# Altium PCB PCBBB.PcbDoc
Units mil, origin at the board's own origin, x right, y up, seen from the top; angles counter-clockwise.
Board outline 2620.03 x 3795.03 mil, 2 copper layers (Top Layer, Bottom Layer); 31 components, 32 nets, 149 pads, 5 vias.
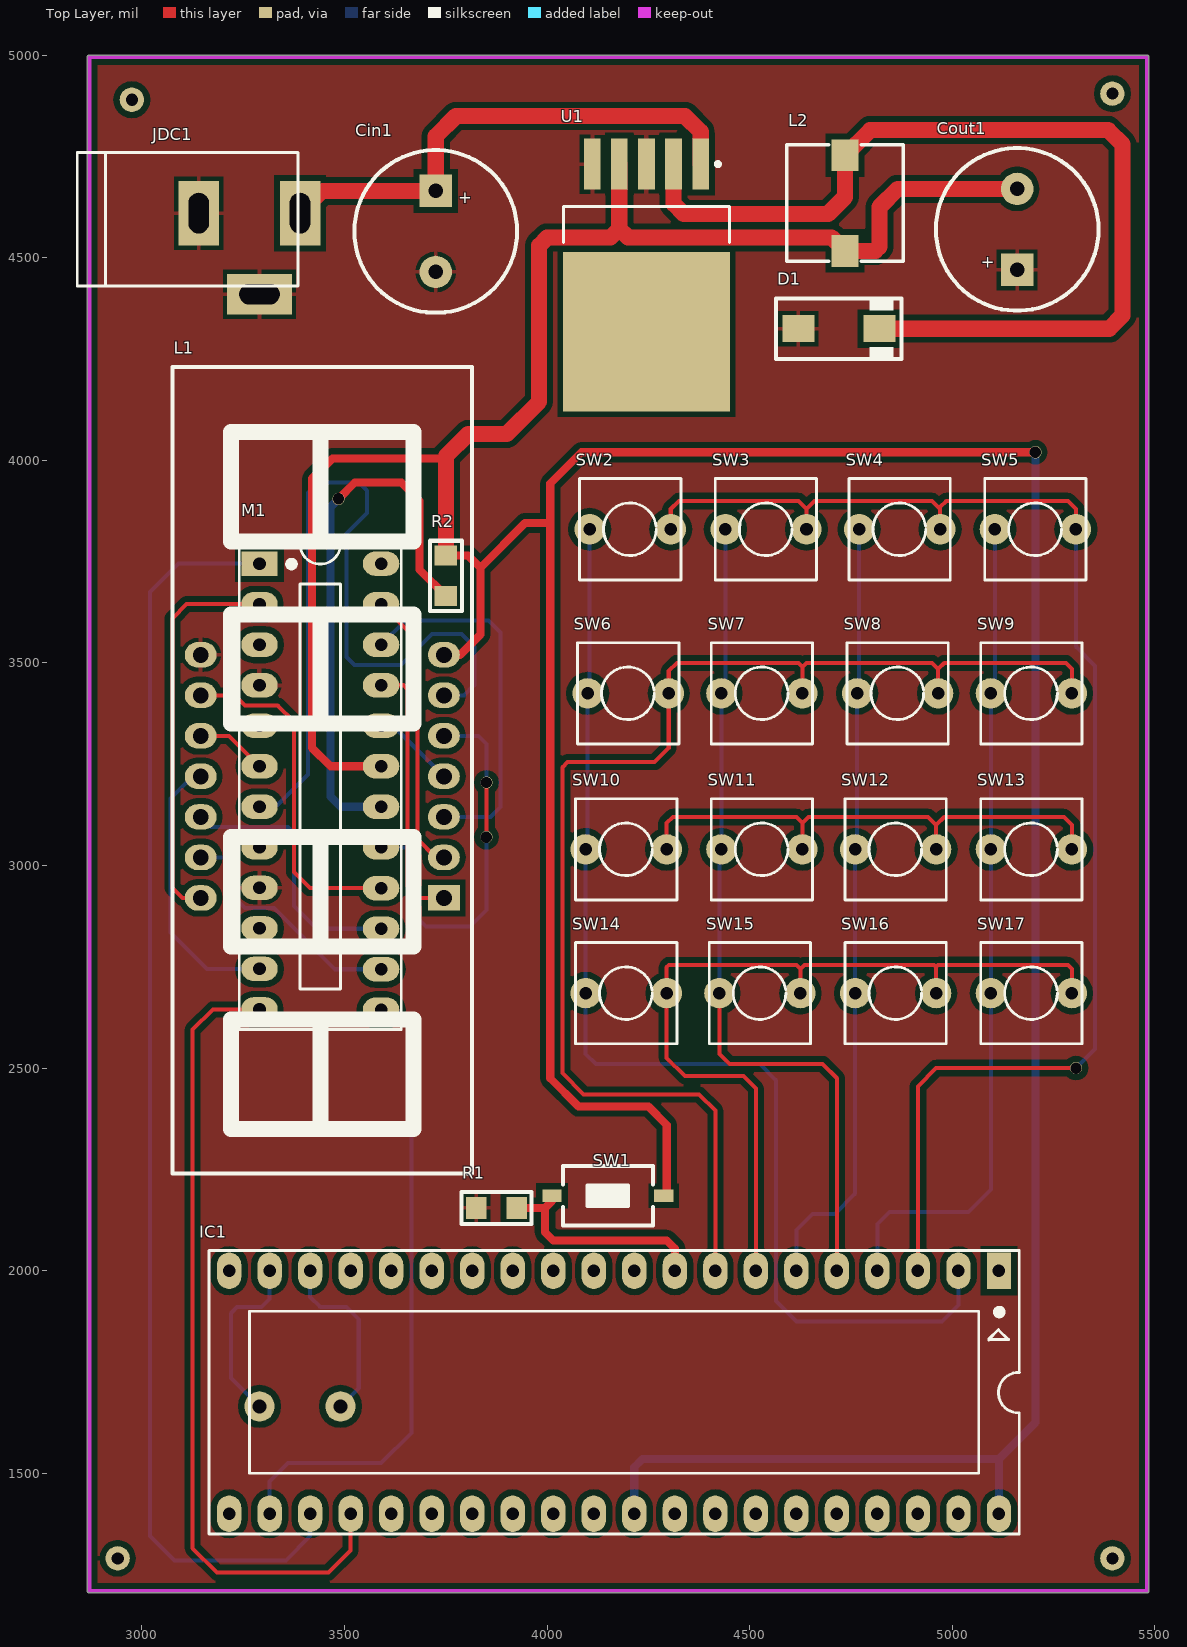
[diagram p0: Top Layer view]
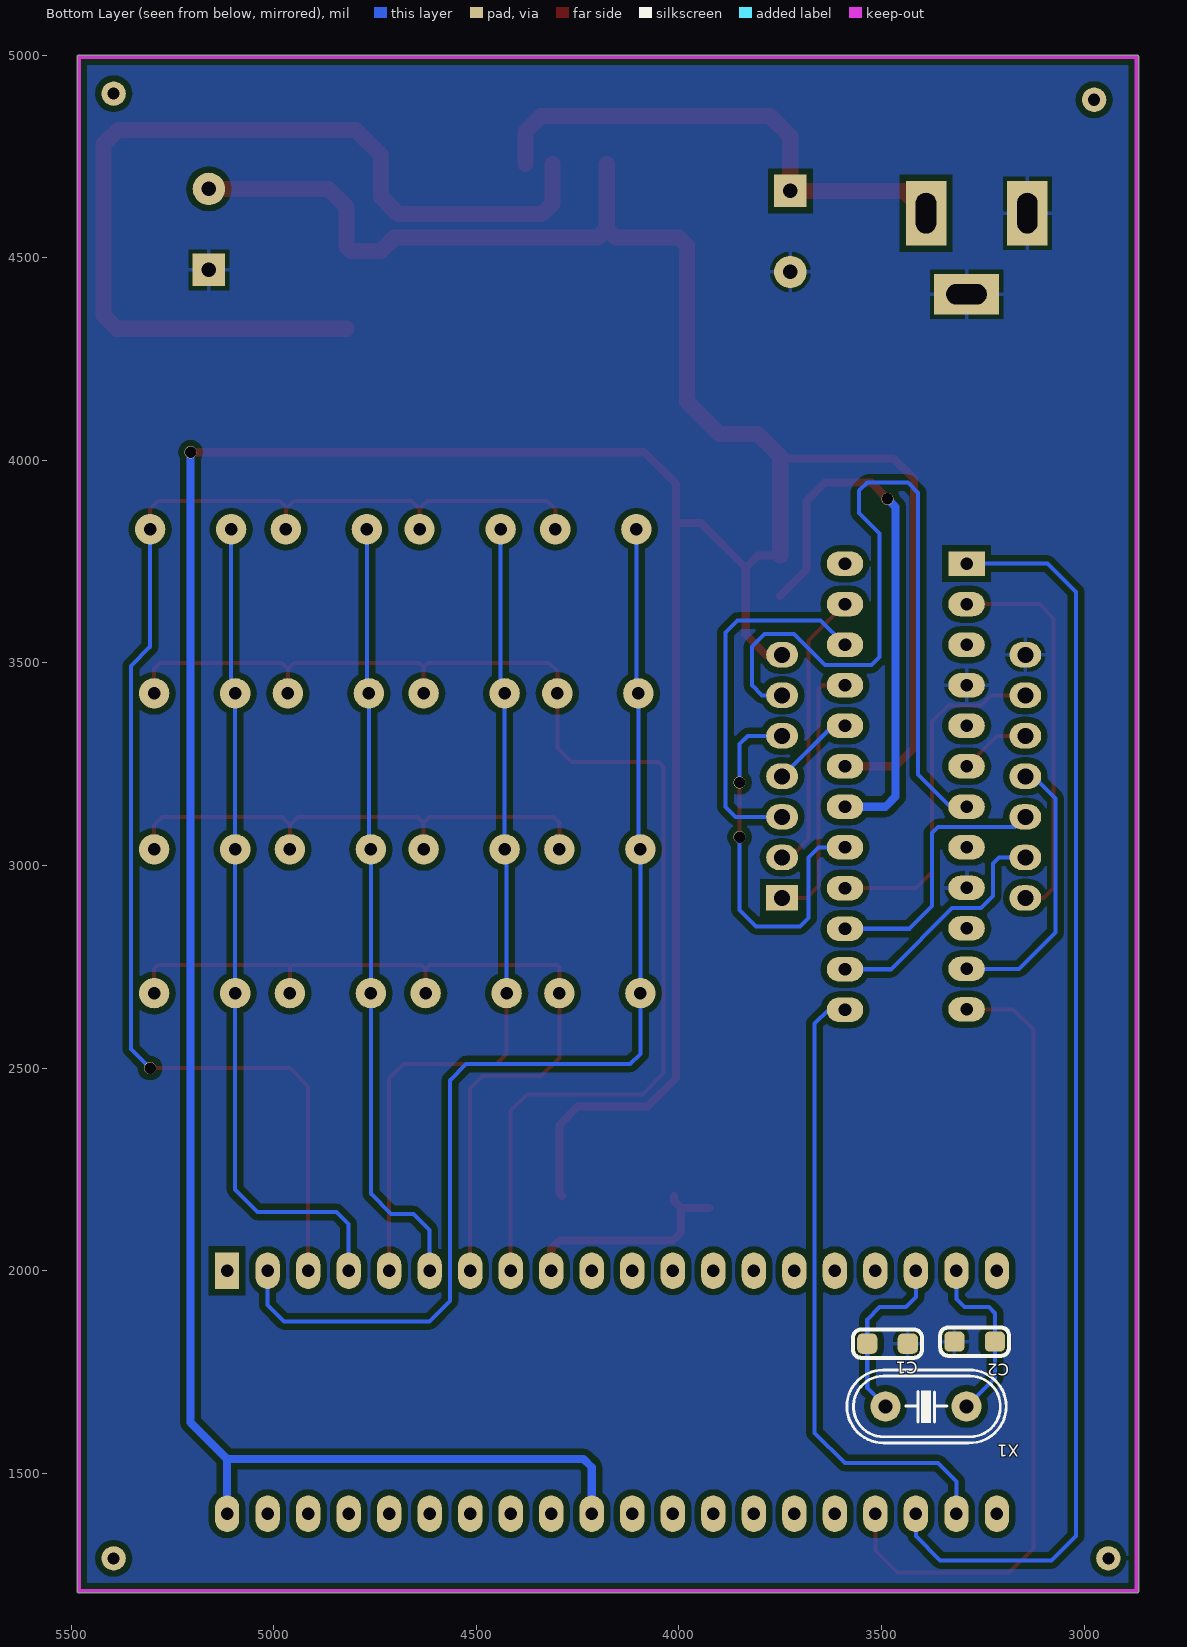
[diagram p1: Bottom Layer view, seen from below]

## Layer stack, top to bottom
Top Solder: solder mask 0.4, Solder Resist, Dk 3.5
Top Layer: signal copper 1.4
Dielectric 1: dielectric 12.6, FR-4, Dk 4.8
Bottom Layer: signal copper 1.4
Bottom Solder: solder mask 0.4, Solder Resist, Dk 3.5

## Board outline
2864.99,1210 ccw(c2870,1210) 2870,1204.98 5480,1204.98 ccw(c5480,1210) 5485.02,1210 5485.02,1305 5485.01,4994.96 5485.01,4995 ccw(c5480,4995) 5480,5000.02 2870,5000.02 ccw(c2870,4995) 2864.99,4995

## Design rules (kind name [scope] priority, off if disabled: settings)
Clearance [All] p1: gap=15 ignorepadtopadclearanceinfootprint=FALSE
PolygonConnect [All] p1: connectstyle=Relief reliefconductorwidth=10 reliefentries=4 polygonreliefangle="90 Angle" airgapwidth=10
RoutingVias [All] p1: holewidth=27.56 width=23.62 viastyle="Through Hole" minholewidth=15.75 minwidth=19.68 maxholewidth=21.65 maxwidth=27.56
SolderMaskExpansion [All] p1: expansion=4
Width [All] p1: maxlimit=40 minlimit=10 preferedwidth=20
30 further rules are at their usual default settings.

## Classes and differential pairs
component class 3: L1 M1 R2
component class 5: Cin1 Cout1 D1 JDC1 L2 U1
component class 4: SW2 SW3 SW4 SW5 SW6 SW7 SW8 SW9 SW10 SW11 SW12 SW13 SW14 SW15 SW16 SW17
component class 2: C1 C2 IC1 R1 SW1 X1

## Components (designator, comment, footprint, x,y, rotation, side; value= is the part's Value field where it differs from the comment)
C1 "22pF" CAP_0805 3485,1820 r0 bottom value=103
C2 "22pF" CAP_0805 3270,1825 r180 bottom value=103
Cin1 "680uF" CAP_D10 3725,4665 r270 top value=103
Cout1 "220uF" CAP_D10 5160,4470 r90 top value=103
D1 "1N5822" SMA 4720,4325 r0 top value="Diode c?m 1N5408"
IC1 "AT89C52" DIP40/W0.6 5115,2000 r180 top
JDC1 "Jac DC" DC-IN 3265,4510 r0 top
L1 "Led 7 Seg 4 digit - Anode" LED7SEG-4-0.56-RG 3450,3240 r90 top
L2 "33uH" L-SMD-M-7.3x4.5 4735,4635 r0 top value="150 mH"
M1 "MAX7219ENG" DIP24/W0.3 3290,3745 r270 top
R1 "10k" RES_SMD_0805 3875,2155 r0 top value="R1W - 100"
R2 "10k" RES_SMD_0805 3750,3715 r90 top value="R1/4W - 1K"
SW1 "SW-2P-S" SW-SMD 4150,2185 r0 top
SW2 "SW" SW2 4105,3830 r0 top value="SW chip 2 pin"
SW3 "SW" SW2 4440,3830 r0 top value="SW chip 2 pin"
SW4 "SW" SW2 4770,3830 r0 top value="SW chip 2 pin"
SW5 "SW" SW2 5105,3830 r0 top value="SW chip 2 pin"
SW6 "SW" SW2 4100,3425 r0 top value="SW chip 2 pin"
SW7 "SW" SW2 4430,3425 r0 top value="SW chip 2 pin"
SW8 "SW" SW2 4765,3425 r0 top value="SW chip 2 pin"
SW9 "SW" SW2 5095,3425 r0 top value="SW chip 2 pin"
SW10 "SW" SW2 4095,3040 r0 top value="SW chip 2 pin"
SW11 "SW" SW2 4430,3040 r0 top value="SW chip 2 pin"
SW12 "SW" SW2 4760,3040 r0 top value="SW chip 2 pin"
SW13 "SW" SW2 5095,3040 r0 top value="SW chip 2 pin"
SW14 "SW" SW2 4095,2685 r0 top value="SW chip 2 pin"
SW15 "SW" SW2 4425,2685 r0 top value="SW chip 2 pin"
SW16 "SW" SW2 4760,2685 r0 top value="SW chip 2 pin"
SW17 "SW" SW2 5095,2685 r0 top value="SW chip 2 pin"
U1 "LM2976" TO-263 4245,4495 r270 top
X1 "12Mhz" XT2 3390,1665 r0 bottom value=4Mhz

## Footprints (in the part's own frame and the unit in brackets; to place one, negate y for a bottom-side part, rotate by r counter-clockwise, add the part's x,y. Pads: shape width x height; smd on the part's side, far side on the other; paste and mask are expansions set on the pad)
CAP_0805 [mil]
  rrect50% 50x50 smd: 1(-50,0) 2(50,0)
  silkscreen extent -85,-35 85,35, body extent -40,-25 40,25, height 24
CAP_D10 [mil]
  rect 80x80 hole 36: 1(0,0)
  round 80 hole 36: 2(200,0)
  silkscreen extent -101,-201 301,201, body extent -107,-207 307,207, height 551
DC-IN [mil] "Jac DC input"
  rect 100x160 hole 50 slot 100 at 90 deg: 1(125,100) 2(-125,100)
  rect 160x100 hole 50 slot 100 at 0 deg: 3(25,-100)
  silkscreen extent -425,-80 120,250, body extent -410,-105 134,269, height 434
DIP24/W0.3 [mil] "DIP24/W.300, Pin to pin 100mil"
  rect 60x90 hole 31: 1(0,0)
  oval 60x90 hole 31: 2(100,0) 3(200,0) 4(300,0) 5(400,0) 6(500,0) 7(600,0) 8(700,0) 9(800,0) 10(900,0) 11(1000,0) 12(1100,0) 13(1101,300) 14(1001,300) 15(901,300) 16(801,300) 17(700,300) 18(600,300) 19(500,300) 20(400,300) 21(300,300) 22(200,300) 23(100,300) 24(0,300)
  silkscreen extent -50,-50 1150,350, body extent -89,-3 1181,307, height 200
DIP40/W0.6 [mil] "40 PIN, W 600mil, Pin to pin 100mil"
  rect 60x90 hole 31: 1(0,0)
  oval 60x90 hole 31: 2(100,0) 3(200,0) 4(300,0) 5(400,0) 6(500,0) 7(600,0) 8(700,0) 9(800,0) 10(900,0) 11(1000,0) 12(1100,0) 13(1200,0) 14(1300,0) 15(1400,0) 16(1500,0) 17(1600,0) 18(1700,0) 19(1800,0) 20(1900,0) 21(1900,600) 22(1800,600) 23(1700,600) 24(1600,600) 25(1500,600) 26(1400,600) 27(1300,600) 28(1200,600) 29(1100,600) 30(1000,600) 31(900,600) 32(800,600) 33(700,600) 34(600,600) 35(500,600) 36(400,600) 37(300,600) 38(200,600) 39(100,600) 40(0,600)
  silkscreen extent -50,-50 1950,650, body extent -82,-10 1982,600, height 224
L-SMD-M-7.3x4.5 [mm] "WE-PDA SMD Shielded Power Inductor, 7345"
  rect 1.7x2 smd: 1(0,3) 2(0,-3)
  silkscreen extent -3.65,-3.65 3.65,3.65, body extent -3.65,-3.65 3.65,3.65, height 4.05
LED7SEG-4-0.56-RG [mil]
  round 60 on Top Overlay: 0(-535,-205) 0(-85,-205) 0(465,-205) 0(915,-205)
  round 118.11 on Top Overlay: 0(-20,155) 0(-20,-95)
  rect 62.99x78.74 hole 39.37: 1(-320,-295)
  oval 62.99x78.74 hole 39.37: 2(-220,-295) 3(-120,-295) 4(-20,-295) 5(80,-295) 6(180,-295) 7(280,-295) 8(280,305) 9(180,305) 10(80,305) 11(-20,305) 12(-120,305) 13(-220,305) 14(-320,305)
  silkscreen extent -1000,-365 990,375, body extent -995,-370 985,378, height 565
RES_SMD_0805 [mil]
  rect 50x55 smd: 1(-50,0) 2(50,0)
  silkscreen extent -87,-40 87,39, body extent -45,-27 45,27, height 30
SMA [mm]
  rect 2x1.7 smd: 1(-2.544,0) 2(2.544,0)
  silkscreen extent -3.94,-1.9 3.94,1.91, body extent -2.87,-1.4 2.87,1.4, height 2.29
SW2 [mil] "SW button 2pin, 250x 250 mil"
  round 75 hole 31: 1(0,0) 2(200,0)
  silkscreen extent -25,-125 225,125
SW-SMD [mm] "Switch SMD type"
  rect 1.2x0.8 smd: 1(-3.5,0) 2(3.5,0)
  silkscreen extent -2.82,-1.85 2.82,1.85, body extent -3.05,-1.85 3.05,1.85, height 2.5
TO-263 [mm]
  rect 3.2x1.05 smd: 1(-6,3.4) 2(-6,1.7) 3(-6,0) 4(-6,-1.7) 5(-6,-3.4)
  rect 10x10.45 smd: 6(4.5,0)
  silkscreen extent -6.12,-5.2 -1.1,5.2, body extent -6.58,-5.2 7.57,5.2, height 4.65
XT2 [mil] "Footpin for Crystal 2 pin"
  round 75 hole 34: 1(-100,0) 2(100,0)
  silkscreen extent -198,-90 195,90, body extent -233,-93 213,90, height 138

## Part data
C1 C2 Cin1 Cout1: library part C, "Cap SMD"
D1: "Schottky Rectifiers"
IC1: "Atmel AT89C52, 8k Byte Flash Memory , 40 Pin"
JDC1: library part DCIN, "Jac DC input"
L1: library part LED7SEG-4-RG
L2: library part L1, "Inductor"
M1: "Serially Interfaced, 8-Digit LED Display Driver", Code_JEDEC=MS-001-AF, ComponentLink1Description="Manufacturer Link", ComponentLink1URL=http://www.maxim-ic.com/, ComponentLink2Description=Datasheet, ComponentLink2URL=http://pdfserv.maxim-ic.com/en/ds/MAX7219-MAX7221.pdf, DatasheetVersion=Jul-1997, LatestRevisionDate=29-May-2009, LatestRevisionNote="Component Body Added.", PackageDescription="DIP, 24-Pin, Row Spacing 7.62 mm, Pitch 2.54 mm", PackageReference=NG24A, PackageVersion=1997, Published=16-Jan-2001, Publisher="Altium Limited"
R1: library part R1W, "Resistor 1W"
R2: library part R1/4W, "Resistor 1/4W"
SW1: library part SW-2PIN-SMALL, "Switch Small 2 Pin", LatestRevisionDate=17-Jul-2002, LatestRevisionNote="Re-released for DXP Platform.", PackageReference=SPST-2, Published=24-Mar-1999, Publisher="Altium Limited"
SW2 SW3 SW4 SW5 SW6 SW7 SW8 SW9 SW10 SW11 SW12 SW13 SW14 SW15 SW16 SW17: library part SW2, "Switch button 2 pin"
U1: library part LM2596, Max Input Voltage="12 V", Max Output Current="3 (6.0 peak) A", Max Output Voltage=mV, Temperature Range="-40 to +125 degC", Category=IC-Power, Min Input Voltage=mV, Min Output Voltage=mV, Mounting Technology="Surface Mount", Status=Unreleased, Supply Voltage=mV
X1: library part XT2, "Crystal For all Crystal 2pin."

## Free pads (board coordinates)
  round 60 hole 30: 2(2975,4890) 3(5395,4905) 4(5395,1290) 5(2940,1290)

## Via types
v1: diameter 30, hole 28, Top Layer to Bottom Layer, 5 vias

## Nets (pads, with @x,y where several pads share a name; then routed paths per layer and width w, separated by ;. In a path a pad name is that pad's centre, name@x,y a point inside that pad or via, vN(x,y) a via of type N, cw(c..) or ccw(c..) an arc to the next point about the centre after c; other vN are vias at no path point)
+5: Cout1.2 IC1.31 IC1.40 L1.7 L2.2 M1.19 R2.2 SW1.2 U1.4 | length 11104.7
  Top Layer w20: M1.19 3465,3245 3420,3290 3420,3955 3470,4005 3745,4005 3750,4010 ; L1.7 3785,3520 3835,3570 3835,3735 ; R2.2 3805,3765 3835,3735 ; SW1.2 4295,2192.2 4295,2360 4250,2405 4077.57,2405 4007.5,2475.07 4007.5,3845 ; v1(5205,4020) 4085,4020 4007.5,3942.5 4007.5,3845 ; 3835,3735 3945,3845 4007.5,3845
  Top Layer w40: R2.2 3750,4010 3805,4065 3900,4065 3980,4145 3980,4530 3999.68,4549.69 4156.14,4549.69 4178.07,4571.61 ; U1.4 4178.07,4571.61 ; Cout1.2 4865,4670 4820.16,4625.16 4820.16,4527.05 4810,4516.89 L2.2 4701.89,4550 4199.69,4550 4178.07,4571.61
  Bottom Layer w20: IC1.31 4215,1515 4235,1535 5115,1535 ; IC1.40 5115,1535 ; v1(5205,4020) 5205,1625 5115,1535
D0: L1.14 M1.2 | length 974.9
  Top Layer w10: L1.14 3100,2920 3075,2945 3075,3610 3110,3645 M1.2
D1: L1.11 M1.11 | length 685.1
  Bottom Layer w10: L1.11 3125,3220 3070,3165 3070,2835 3160,2745 M1.11
D2: L1.10 M1.6 | length 176.1
  Top Layer w10: L1.10 3215,3320 M1.6
D3: L1.6 M1.7 | length 1990.9
  Bottom Layer w10: M1.7 3330,3145 3410,3225 3410,3920 3435,3945 3535,3945 3555,3925 3555,3870 3505,3820 3505,3515 3525,3495 3639.3,3495 3715.8,3571.5 3788.5,3571.5 3820,3540 3820,3445 3795,3420 L1.6
GND: C1.1 C2.1 Cin1.2 Cout1.1 D1.1 JDC1.2 JDC1.3 L1.8 M1.4 M1.9 R1.1 U1.3 U1.5
NetC1_2: C1.2 IC1.18 X1.2 | length 441.4
  Bottom Layer w10: IC1.18 3415,1935 3440,1910 3505,1910 3535,1880 C1.2 3535,1710 X1.2
NetC2_2: C2.2 IC1.19 X1.1 | length 438.5
  Bottom Layer w10: X1.1 3220,1735 C2.2 3220,1895 3235,1910 3295,1910 3315,1930 IC1.19
NetCin1_1: Cin1.1 JDC1.1 U1.1 | length 1263.4
  Top Layer w40: JDC1.1 3445,4665 Cin1.1 3725,4800 3775,4850 4340,4850 4378.86,4811.14 U1.1
NetD1_2: D1.2 L2.1 U1.2 | length 2412.8
  Top Layer w40: U1.2 4311.93,4633.07 4336.93,4608.07 4693.07,4608.07 4735,4650 L2.1 4796.89,4815 5385,4815 5420,4780 5420,4357.83 5387.17,4325 D1.2
NetIC1_1: IC1.1
NetIC1_2: IC1.2 SW2.1 SW6.1 SW10.1 SW14.1 | length 2913.3
  Bottom Layer w10: SW2.1 4105,3430 SW6.1 4100,3045 SW10.1 SW14.1 4095,2535 4120,2510 4525,2510 4565,2470 4565,1925 4615,1875 4975,1875 5015,1915 IC1.2
NetIC1_3: IC1.3 SW2.2 SW3.2 SW4.2 SW5.2 | length 3485.6
  Top Layer w10: SW2.2 4305,3880 4325,3900 4620,3900 4640,3880 ; SW3.2 4640,3880 ; IC1.3 4915,2455 4960,2500 v1(5305,2500) ; SW4.2 4970,3880 ; SW5.2 5305,3880 5285,3900 4985,3900 4970,3885 4970,3880 ; 4640,3880 4660,3900 4950,3900 4970,3880
  Bottom Layer w10: v1(5305,2500) 5352.5,2547.5 5352.5,3492.5 5305,3540 SW5.2
NetIC1_4: IC1.4 SW5.1 SW9.1 SW13.1 SW17.1 | length 2064.4
  Bottom Layer w10: IC1.4 4815,2115 4845,2145 5040,2145 5095,2200 SW17.1 SW13.1 SW9.1 5105,3435 SW5.1
NetIC1_5: IC1.5 SW3.1 SW7.1 SW11.1 SW15.1 | length 2091.1
  Top Layer w10: SW15.1 4425,2535 4450,2510 4680,2510 4715,2475 IC1.5
  Bottom Layer w10: SW15.1 4425,3035 SW11.1 SW7.1 4440,3435 SW3.1
NetIC1_6: IC1.6 SW4.1 SW8.1 SW12.1 SW16.1 | length 1926.4
  Bottom Layer w10: IC1.6 4615,2100 4655,2140 4710,2140 4760,2190 SW16.1 SW12.1 4765,3045 SW8.1 4770,3430 SW4.1
NetIC1_7: IC1.7 SW14.2 SW15.2 SW16.2 SW17.2 | length 2129.1
  Top Layer w10: IC1.7 4515,2450 4485,2480 4340,2480 4295,2525 SW14.2 4295,2749 4301,2755 4615,2755 4625,2745 ; SW15.2 4625,2745 ; SW16.2 4960,2750 ; SW17.2 5295,2745 5285,2755 4965,2755 4960,2750 ; 4625,2745 4635,2755 4955,2755 4960,2750
NetIC1_8: IC1.8 SW6.2 SW7.2 SW8.2 SW9.2 | length 3253.2
  Top Layer w10: IC1.8 4415,2395 4375,2435 4090,2435 4037.5,2487.5 4037.5,3242.5 4050,3255 4265,3255 4300,3290 SW6.2 4300,3480 4320,3500 4620,3500 4630,3490 ; SW7.2 4630,3490 ; SW8.2 4965,3485 ; SW9.2 5295,3485 5280,3500 4980,3500 4965,3485 ; 4630,3490 4640,3500 4950,3500 4965,3485
NetIC1_9: IC1.9 R1.2 SW1.1 | length 558.7
  Top Layer w20: R1.2 3995,2155 ; SW1.1 4012.2,2172.2 3995,2155 ; IC1.9 4315,2055 4295,2075 4015,2075 3995,2095 3995,2155
NetIC1_22: IC1.22 M1.13 | length 1578.8
  Bottom Layer w10: IC1.22 3315,1480 3360,1525 3590,1525 3665,1600 3665,2610 3631,2644 M1.13
NetIC1_23: IC1.23 M1.1 | length 3128.7
  Bottom Layer w10: M1.1 3090,3745 3020,3675 3020,1345 3080,1285 3355,1285 3415,1345 IC1.23
NetIC1_24: IC1.24 M1.12 | length 1993.3
  Top Layer w10: M1.12 3175,2645 3125,2595 3125,1315 3185,1255 3460,1255 3515,1310 IC1.24
NetL1_1: L1.1 M1.21 | length 656.6
  Top Layer w10: M1.21 3645,3445 3655,3435 3655,2950 3685,2920 L1.1
NetL1_2: L1.2 M1.23 | length 700.9
  Top Layer w10: M1.23 3680,3555 3680,3065 3725,3020 L1.2
NetL1_3: L1.3 M1.22 | length 912.6
  Bottom Layer w10: M1.22 3650,3605 3855,3605 3885,3575 3885,3145 3860,3120 L1.3
NetL1_4: L1.4 M1.20 | length 206.8
  Bottom Layer w10: M1.20 3620,3345 L1.4
NetL1_5: L1.5 M1.17 | length 968
  Top Layer w10: v1(3850,3070) v1(3850,3205)
  Bottom Layer w10: M1.17 3655,3045 3680,3020 3680,2870.8 3700.8,2850 3810,2850 3850,2890 v1(3850,3070) ; L1.5 3830,3320 3850,3300 v1(3850,3205)
NetL1_9: L1.9 M1.16 | length 859.5
  Top Layer w10: L1.9 3229.29,3420 3254.29,3395 3335,3395 3375,3355 3375,2984 3415,2944 M1.16
NetL1_12: L1.12 M1.15 | length 664.8
  Bottom Layer w10: L1.12 3170,3095 3360,3095 3375,3080 3375,2900 3431,2844 M1.15
NetL1_13: L1.13 M1.14 | length 606.6
  Bottom Layer w10: L1.13 3210,3020 3225,3005 3225,2924.29 3254.29,2895 3325.71,2895 3476.71,2744 M1.14
NetM1_18: M1.18 R2.1 | length 1375.8
  Top Layer w20: v1(3485,3905) 3525,3945 3640,3945 3685,3900 3685,3730 R2.1
  Bottom Layer w20: v1(3485,3905) 3465,3885 3465,3170 3490,3145 M1.18
NetSW10_2: SW10.2 SW11.2 SW12.2 SW13.2 | length 1293.5
  Top Layer w10: SW10.2 4295,3105 4310,3120 4615,3120 4630,3105 ; SW11.2 4630,3105 ; SW12.2 4960,3100 ; SW13.2 5295,3100 5275,3120 4980,3120 4960,3100 ; 4630,3105 4645,3120 4940,3120 4960,3100
pads on no net: IC1.10 IC1.11 IC1.12 IC1.13 IC1.14 IC1.15 IC1.16 IC1.17 IC1.20 IC1.21 IC1.25 IC1.26 IC1.27 IC1.28 IC1.29 IC1.30 IC1.32 IC1.33 IC1.34 IC1.35 IC1.36 IC1.37 IC1.38 IC1.39 L1.0 M1.3 M1.5 M1.8 M1.10 M1.24 U1.6

## Polygon pours and split planes (outlines as drawn)
GND on Top Layer "Khoideptry" (solid, remove dead copper, pour order 2): 2870,4995 2870,1210 5480,1210 5480,4995
GND on Bottom Layer "Khoideptry" (solid, remove dead copper, pour order 4): 2870,4995 2870,1210 5480,1210 5480,4995

## Keep-outs
Keep-Out Layer:
  lines w10: 2870,1210 2870,4995 5480,4995 5480,1305 5480,1210 2870,1210

## Text inside footprints (layer, text, board x,y; h text height)
Cin1: Top Overlay "+" at 3780,4634 h30
Cout1: Top Overlay "+" at 5105,4501 h30 r180